# Altium PCB TM1638.PcbDoc (part 1 of 2)
Units mil, origin at the board's own origin, x right, y up, seen from the top; angles counter-clockwise.
Board outline 4735 x 2655 mil, 2 copper layers (Top Layer, Bottom Layer); 45 components, 32 nets, 151 pads, 57 vias.
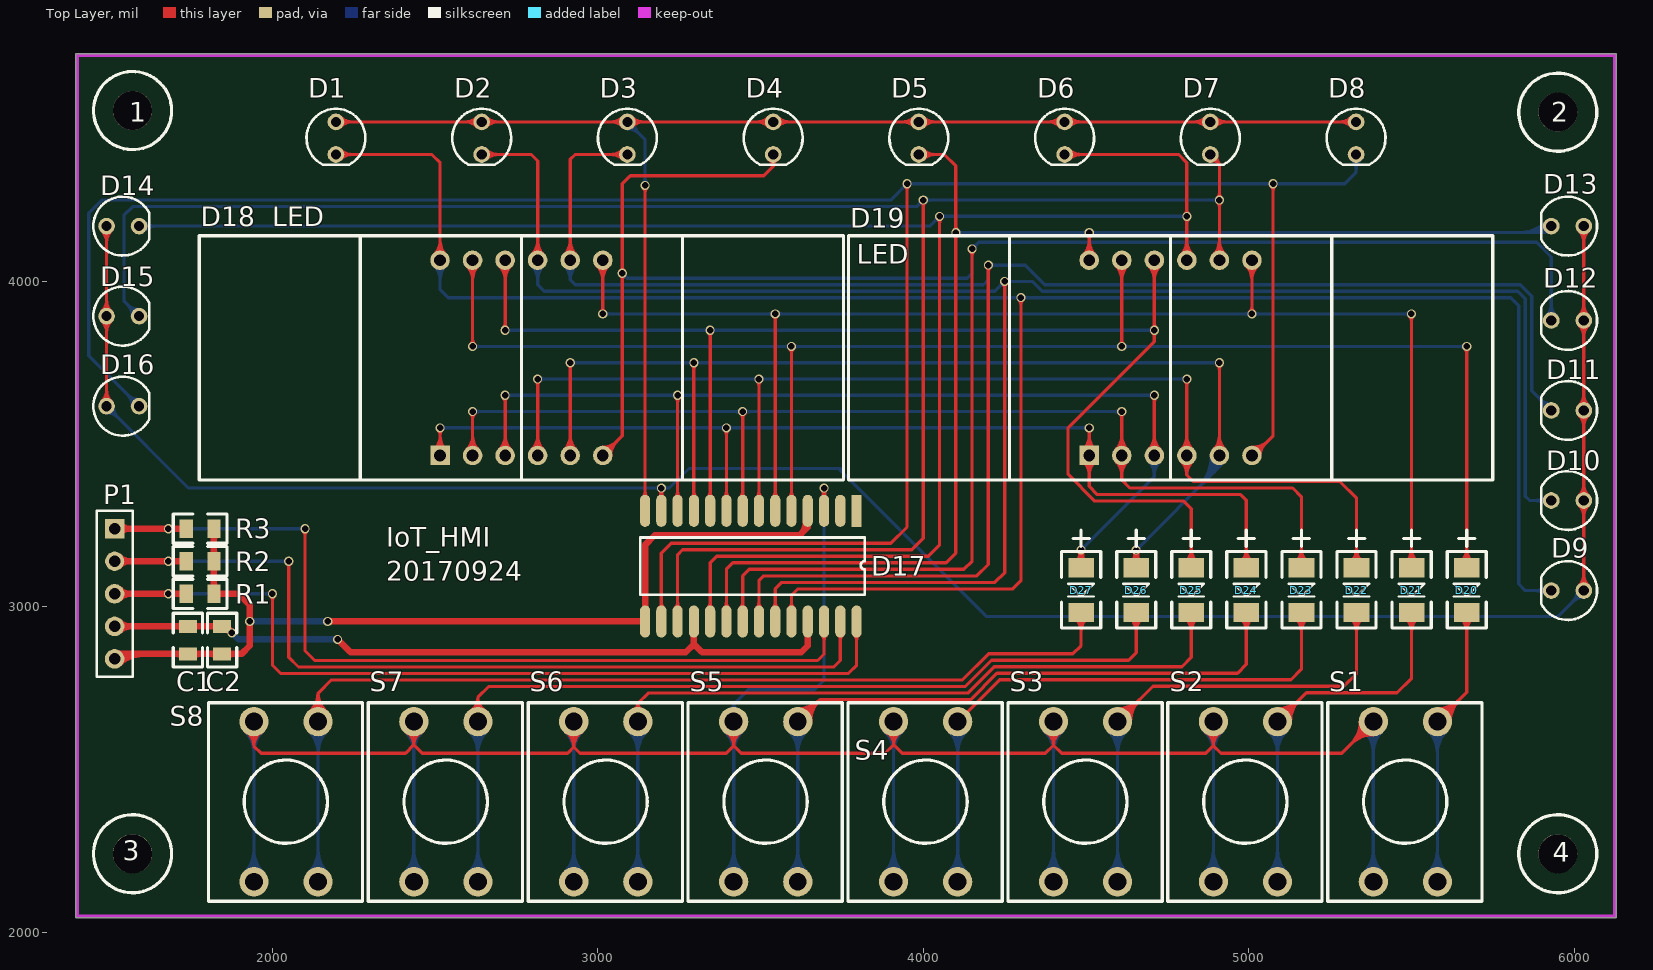
[diagram p0: Top Layer view]
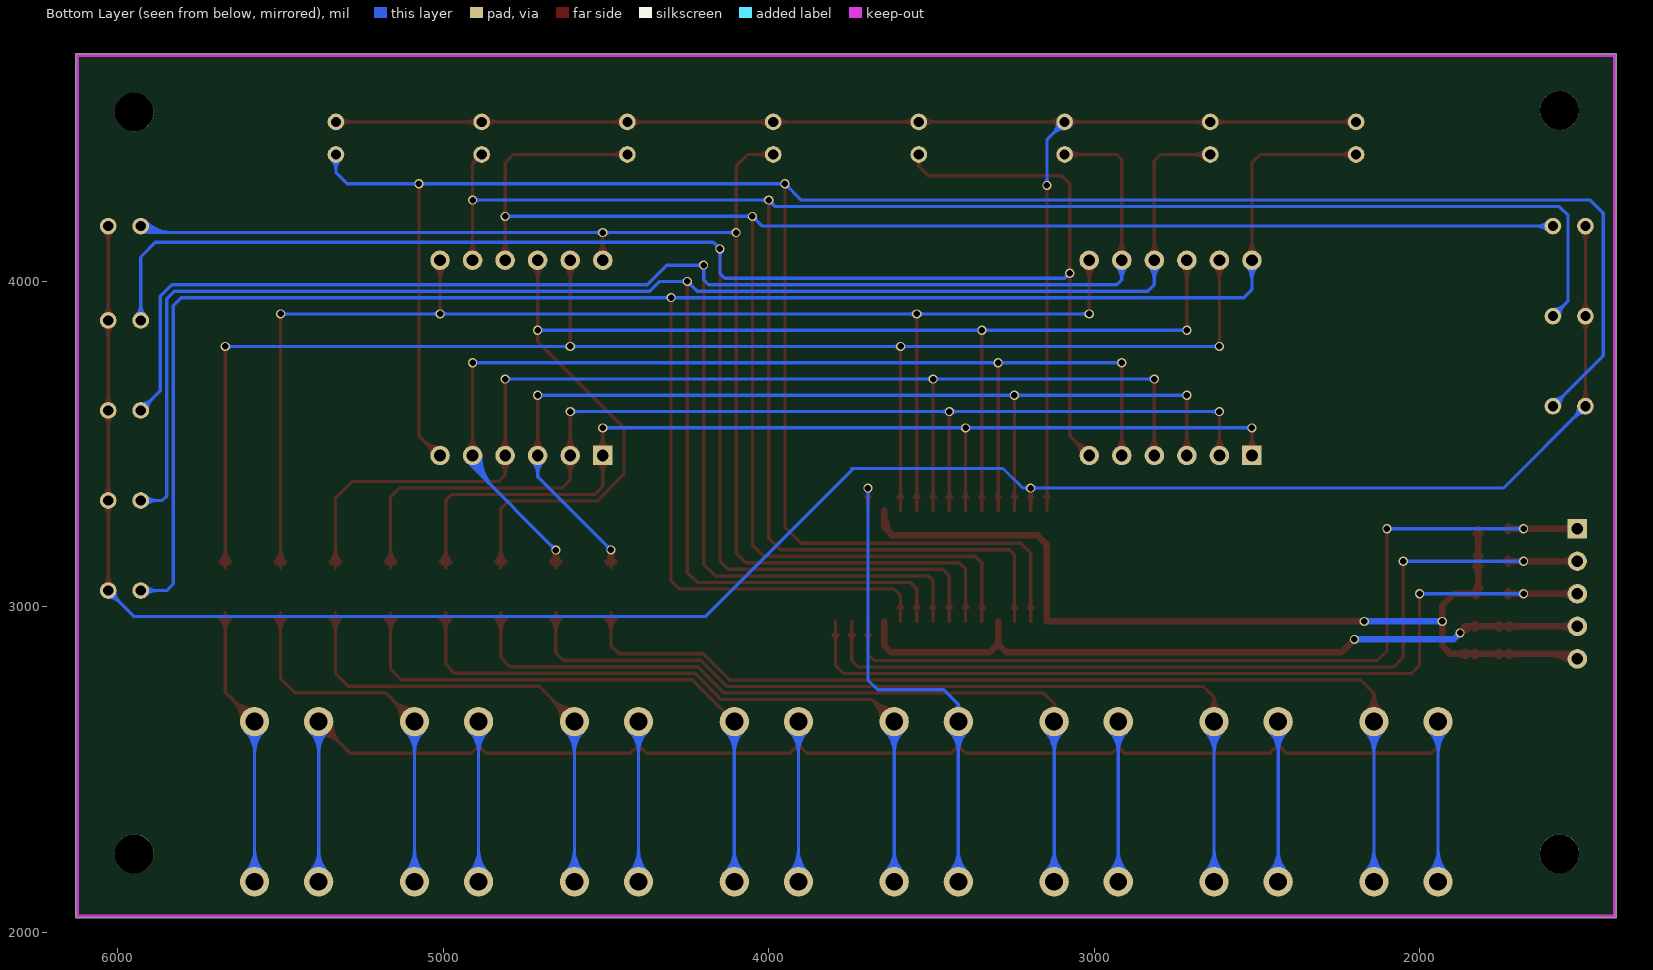
[diagram p1: Bottom Layer view, seen from below]

## Layer stack, top to bottom
Top Layer: signal copper 1.4
Dielectric: dielectric 12.6, FR-4, Dk 4.8
Bottom Layer: signal copper 1.4

## Board outline
1395,4700 6130,4700 6130,2045 1395,2045

## Design rules (kind name [scope] priority, off if disabled: settings)
Clearance [All] p1: gap=10
ComponentClearance [All] p1 off: gap=10 collisioncheckmode=3 verticalgap=10 showdistances=TRUE
Height [All] p1 off: minheight=0 maxheight=1000 prefheight=500
PolygonConnect [All] p1: connectstyle=Relief reliefconductorwidth=10 reliefentries=4 polygonreliefangle="90 Angle"
RoutingVias [All] p1: holewidth=20 width=28 viastyle="Through Hole" minholewidth=20 minwidth=28 maxholewidth=20 maxwidth=28
SilkscreenOverComponentPads [All] p1: minsilkscreentomaskgap=10
SolderMaskExpansion [All] p1: expansion=4
Width [All] p1: maxlimit=20 minlimit=10 preferedwidth=10
25 further rules are at their usual default settings.

## Classes and differential pairs
component class TM1638: 1 2 3 4 D1 D2 D3 D4 D5 D6 D7 D8 D9 D10 D11 D12 D13 D14 D15 D16 D19 D20 D21 D22 D23 D24 D25 D26 D27 P1 S1 S2 S3 S4 S5 S6 S7 S8

## Components (designator, comment, footprint, x,y, rotation, side; value= is the part's Value field where it differs from the comment)
1 "SIP1" hole 1570,4525 r90 top
2 "SIP1" hole 5950,4520 r90 top
3 "SIP1" hole 1570,2241 r90 top
4 "SIP1" hole 5950,2241 r90 top
C1 "Cap Pol3" 0805 1785,2815 r90 top
C2 "104" 0805 1800,2980 r270 top
D1 "LED3" LED0 2195,4440 r270 top
D2 "LED3" LED0 2642.86,4440 r270 top
D3 "LED3" LED0 3090.71,4440 r270 top
D4 "LED3" LED0 3538.57,4440 r270 top
D5 "LED3" LED0 3986.43,4440 r270 top
D6 "LED3" LED0 4434.29,4440 r270 top
D7 "LED3" LED0 4882.14,4440 r270 top
D8 "LED3" LED0 5330,4440 r270 top
D9 "LED3" LED0 5980,3050 r180 top
D10 "LED3" LED0 5980,3326.67 r180 top
D11 "LED3" LED0 5980,3603.33 r180 top
D12 "LED3" LED0 5980,3880 r180 top
D13 "LED3" LED0 5980,4170 r180 top
D14 "LED3" LED0 1540,4170 r0 top
D15 "LED3" LED0 1540,3893.33 r0 top
D16 "LED3" LED0 1540,3616.67 r0 top
D17 "TM1638" SOP28 3795,3295 r270 top locked
D18 "LED4" LED4 1775,3390 r0 top locked
D19 "LED4" LED4 3770,3390 r0 top locked
D20 "Diode 1N4006" 1N4148 5610,3170 r270 top
D21 "Diode 1N4006" 1N4148 5440.71,3170 r270 top
D22 "Diode 1N4006" 1N4148 5271.43,3170 r270 top
D23 "Diode 1N4006" 1N4148 5102.14,3170 r270 top
D24 "Diode 1N4006" 1N4148 4932.86,3170 r270 top
D25 "Diode 1N4006" 1N4148 4763.57,3170 r270 top
D26 "Diode 1N4006" 1N4148 4594.29,3170 r270 top
D27 "Diode 1N4006" 1N4148 4425,3170 r270 top
P1 "MHDR1X5" CON5 1515,3240 r270 top
R1 "Res2" 0805 1695,2995 r0 top
R2 "Res2" 0805 1695,3095 r0 top
R3 "Res2" 0805 1695,3195 r0 top
S1 "SW-PB" key 5480,2400 r90 top locked
S2 "SW-PB" key 4988.57,2400 r90 top locked
S3 "SW-PB" key 4497.14,2400 r90 top locked
S4 "SW-PB" key 4005.71,2400 r90 top locked
S5 "SW-PB" key 3514.29,2400 r90 top locked
S6 "SW-PB" key 3022.86,2400 r90 top locked
S7 "SW-PB" key 2531.43,2400 r90 top locked
S8 "SW-PB" key 2040,2400 r90 top locked

## Footprints (in the part's own frame and the unit in brackets; to place one, negate y for a bottom-side part, rotate by r counter-clockwise, add the part's x,y. Pads: shape width x height; smd on the part's side, far side on the other; paste and mask are expansions set on the pad)
1N4148 [mm]
  rect 1.5x2 smd: 1(1.27,1.524) 2(4.77,1.524)
  silkscreen extent -1.65,0 5.97,3.05
0805 [mil]
  rect 40x56 smd: 1(40,45) 2(125,45)
  silkscreen extent 0,0 165,90
CON5 [mil]
  rect 59.06x59.06 hole 35.43: 1(0,0)
  round 59.06 hole 35.43: 2(100,0)
  round 60 hole 36: 3(200,0) 4(300,0) 5(400,0)
  silkscreen extent -55,-55 455,55
hole [mil]
  round 120 hole 120: ""(0,0)
  silkscreen extent -120,-120 120,120
key [mil]
  round 90 hole 55: 1(-245,97) 1(247,97) 2(-245,-100) 2(247,-100)
  silkscreen extent -305,-237 305,237
LED0 [mm]
  round 1.3 hole 0.8: 1(-1.27,0) 2(1.27,0)
  silkscreen extent -2.3,-2.3 2.06,2.3
LED4 [mil]
  rect 60x60 hole 36: 1(740,75)
  round 60 hole 36: 2(840,75) 3(940,75) 4(1040,75) 5(1140,75) 6(1240,75) 7(1240,675) 8(1140,675) 9(1040,675) 10(940,675) 11(840,675) 12(740,675)
  silkscreen extent 0,0 1980,750
SOP28 [mm]
  rect 2.5x0.8 smd: 1(0,0)
  oval 2.5x0.8 smd: 2(0,-1.27) 3(0,-2.54) 4(0,-3.81) 5(0,-5.08) 6(0,-6.35) 7(0,-7.62) 8(0,-8.89) 9(0,-10.16) 10(0,-11.43) 11(0,-12.7) 12(0,-13.97) 13(0,-15.24) 14(0,-16.51) 15(8.636,-16.51) 16(8.636,-15.24) 17(8.636,-13.97) 18(8.636,-12.7) 19(8.636,-11.43) 20(8.636,-10.16) 21(8.636,-8.89) 22(8.636,-7.62) 23(8.636,-6.35) 24(8.636,-5.08) 25(8.636,-3.81) 26(8.636,-2.54) 27(8.636,-1.27) 28(8.636,0)
  silkscreen extent 2.09,-16.89 6.56,0.64

## Part data
1 2 3 4: "Variable Resistor"
C1: "Polarized Capacitor (Surface Mount)"
C2: library part "Cap Semi", "Capacitor (Semiconductor SIM Model)"
D1 D2 D3 D4 D5 D6 D7 D8 D9 D10 D11 D12 D13 D14 D15 D16: "Typical BLUE SiC LED"
D18 D19: library part LED_N4
D20 D21 D22 D23 D24 D25 D26 D27: "1 Amp General Purpose Rectifier"
P1: "Header, 5-Pin"
R1 R2 R3: "Resistor"
S1 S2 S3 S4 S5 S6 S7 S8: "Switch"

## Via types
v1: diameter 28, hole 20, Top Layer to Bottom Layer, 57 vias

## Nets (pads, with @x,y where several pads share a name; then routed paths per layer and width w, separated by ;. In a path a pad name is that pad's centre, name@x,y a point inside that pad or via, vN(x,y) a via of type N, cw(c..) or ccw(c..) an arc to the next point about the centre after c; other vN are vias at no path point)
CLK: D17.27 P1.2 R2.1 | length 3044.1
  Top Layer w10: v1(2050,3140) 2050,2845 2080,2815 2855,2815 3725,2815 3745,2835 D17.27@3745,2955 ; D17.27@3737.4,2913.94 cw(c3719.05,2895.59) 3745,2895.59 cw(c3770.95,2895.59) D17.27@3752.6,2913.94 ; 2050,3118.27 ccw(c2028.27,3118.27) 2043.64,3133.64 cw(c2028.27,3118.27) 2050,3118.27 ; 2050,3118.27 cw(c2071.73,3118.27) 2056.36,3133.64 ccw(c2071.73,3118.27) 2050,3118.27
  Top Layer w20: P1.2@1515,3140 v1(1680,3140) R2.1@1735,3140 ; P1.2@1528.81,3126.19 cw(c1562.14,3092.86) 1562.14,3140 cw(c1562.14,3187.14) P1.2@1528.81,3153.81 ; R2.1@1727.93,3132.93 ccw(c1710.86,3115.86) 1710.86,3140 ccw(c1710.86,3164.14) R2.1@1727.93,3147.07
  Bottom Layer w10: v1(1680,3140) v1(2050,3140) ; v1@1686.36,3133.64 cw(c1701.73,3118.27) 1701.73,3140 cw(c1701.73,3161.73) v1@1686.36,3146.36 ; 2028.27,3140 ccw(c2028.27,3161.73) 2043.64,3146.36 cw(c2028.27,3161.73) 2028.27,3140 ; 2028.27,3140 cw(c2028.27,3118.27) 2043.64,3133.64 ccw(c2028.27,3118.27) 2028.27,3140
  other v1: 2050,3140
DIO: D17.26 P1.1 R3.1 | length 3054.1
  Top Layer w10: v1(2100,3240) 2100,2865 2130,2835 3675,2835 3695,2855 D17.26@3695,2955 ; D17.26@3687.4,2913.94 cw(c3669.05,2895.59) 3695,2895.59 cw(c3720.95,2895.59) D17.26@3702.6,2913.94 ; 2100,3218.27 ccw(c2078.27,3218.27) 2093.64,3233.64 cw(c2078.27,3218.27) 2100,3218.27 ; 2100,3218.27 cw(c2121.73,3218.27) 2106.36,3233.64 ccw(c2121.73,3218.27) 2100,3218.27
  Top Layer w20: P1.1@1515,3240 v1(1680,3240) R3.1@1735,3240 ; P1.1@1528.81,3226.19 cw(c1562.14,3192.86) 1562.14,3240 cw(c1562.14,3287.14) P1.1@1528.81,3253.81 ; R3.1@1727.93,3232.93 ccw(c1710.86,3215.86) 1710.86,3240 ccw(c1710.86,3264.14) R3.1@1727.93,3247.07
  Bottom Layer w10: v1(1680,3240) v1(2100,3240) ; v1@1686.36,3233.64 cw(c1701.73,3218.27) 1701.73,3240 cw(c1701.73,3261.73) v1@1686.36,3246.36 ; 2078.27,3240 ccw(c2078.27,3261.73) 2093.64,3246.36 cw(c2078.27,3261.73) 2078.27,3240 ; 2078.27,3240 cw(c2078.27,3218.27) 2093.64,3233.64 ccw(c2078.27,3218.27) 2078.27,3240
  other v1: 2100,3240
GND: C1.2 C2.1 D17.18 D17.25 P1.4 | length 2578.5
  Top Layer w20: P1.4@1515,2940 C1.2@1740,2940 C2.1@1845,2940 1855,2940 v1(1875,2920) ; P1.4@1529.14,2925.86 cw(c1563.28,2891.72) 1563.28,2940 cw(c1563.28,2988.28) P1.4@1529.14,2954.14 ; C1.2@1724.93,2932.93 ccw(c1707.86,2915.86) 1707.86,2940 ccw(c1707.86,2964.14) C1.2@1724.93,2947.07 ; C1.2@1755.07,2932.93 cw(c1772.14,2915.86) 1772.14,2940 cw(c1772.14,2964.14) C1.2@1755.07,2947.07 ; C2.1@1829.93,2932.93 ccw(c1812.86,2915.86) 1812.86,2940 ccw(c1812.86,2964.14) C2.1@1829.93,2947.07 ; C2.1@1853,2930 cw(c1853,2901.03) v1@1873.49,2921.51 ; C2.1@1863,2940 ccw(c1882.31,2940) C2.1@1868.66,2926.34 ; C2.1@1865.36,2932.06 ccw(c1880.59,2940.85) v1@1876.04,2923.86 ; v1(2200,2900) 2240,2860 3270,2860 3295,2885 ; D17.18@3295,2955 3295,2885 ; D17.25@3645,2955 3645,2880 3625,2860 3320,2860 3295,2885
  Bottom Layer w20: v1(1875,2920) 1895,2900 v1(2200,2900)
GR1: D1.2 D9.2 D17.24 D18.12 | length 7295.7
  Top Layer w10: D1.2@2195,4390 2490,4390 2515,4365 D18.12@2515,4065 ; D1.2@2209.56,4375.44 cw(c2244.71,4340.29) 2244.71,4390 cw(c2244.71,4439.71) D1.2@2209.56,4404.56 ; D18.12@2497.32,4082.68 ccw(c2454.64,4125.36) 2515,4125.36 ccw(c2575.36,4125.36) D18.12@2532.68,4082.68 ; D18.12@2504.39,4075.61 ccw(c2478.79,4101.21) 2515,4101.21 ccw(c2551.21,4101.21) D18.12@2525.61,4075.61 ; D17.24@3587.4,2996.06 ccw(c3569.05,3014.41) 3595,3014.41 ccw(c3620.95,3014.41) D17.24@3602.6,2996.06 ; D17.24@3595,2955 3595,3035 3615,3055 4275,3055 4300,3080 v1(4300,3950) ; v1@4293.64,3943.64 cw(c4278.27,3928.27) 4300,3928.27 cw(c4321.73,3928.27) v1@4306.36,3943.64
  Bottom Layer w10: D18.12@2497.32,4047.32 cw(c2454.64,4004.64) 2515,4004.64 cw(c2575.36,4004.64) D18.12@2532.68,4047.32 ; D18.12@2504.39,4054.39 cw(c2478.79,4028.79) 2515,4028.79 cw(c2551.21,4028.79) D18.12@2525.61,4054.39 ; D18.12@2515,4065 2515,3975 2540,3950 v1(4300,3950) 5805,3950 5830,3925 5830,3070 5850,3050 D9.2@5930,3050 ; v1@4293.64,3943.64 ccw(c4278.27,3928.27) 4278.27,3950 ccw(c4278.27,3971.73) v1@4293.64,3956.36 ; v1@4306.36,3943.64 cw(c4321.73,3928.27) 4321.73,3950 cw(c4321.73,3971.73) v1@4306.36,3956.36 ; D9.2@5915.44,3035.44 ccw(c5880.29,3000.29) 5880.29,3050 ccw(c5880.29,3099.71) D9.2@5915.44,3064.56
GR2: D2.2 D10.2 D17.23 D18.9 | length 6653.9
  Top Layer w10: D2.2@2642.86,4390 2795,4390 2815,4370 D18.9@2815,4065 ; D2.2@2657.42,4375.44 cw(c2692.57,4340.29) 2692.57,4390 cw(c2692.57,4439.71) D2.2@2657.42,4404.56 ; D18.9@2797.32,4082.68 ccw(c2754.64,4125.36) 2815,4125.36 ccw(c2875.36,4125.36) D18.9@2832.68,4082.68 ; D18.9@2804.39,4075.61 ccw(c2778.79,4101.21) 2815,4101.21 ccw(c2851.21,4101.21) D18.9@2825.61,4075.61 ; D17.23@3537.4,2996.06 ccw(c3519.05,3014.41) 3545,3014.41 ccw(c3570.95,3014.41) D17.23@3552.6,2996.06 ; D17.23@3545,2955 3545,3055 3565,3075 4220,3075 4250,3105 v1(4250,4000) ; v1@4243.64,3993.64 cw(c4228.27,3978.27) 4250,3978.27 cw(c4271.73,3978.27) v1@4256.36,3993.64
  Bottom Layer w10: D18.9@2797.32,4047.32 cw(c2754.64,4004.64) 2815,4004.64 cw(c2875.36,4004.64) D18.9@2832.68,4047.32 ; D18.9@2804.39,4054.39 cw(c2778.79,4028.79) 2815,4028.79 cw(c2851.21,4028.79) D18.9@2825.61,4054.39 ; D18.9@2815,4065 2815,3990 2835,3970 4220,3970 v1(4250,4000) 4335,4000 4365,3970 5826.72,3970 5850,3946.72 5850,3340 5863.33,3326.67 D10.2@5930,3326.67 ; v1@4241,4000 cw(c4219.27,4000) 4234.64,3984.64 cw(c4250,3969.27) v1@4250,3991 ; v1@4256.36,3993.64 cw(c4271.73,3978.27) 4271.73,4000 cw(c4271.73,4021.73) v1@4256.36,4006.36 ; D10.2@5915.44,3312.11 ccw(c5880.29,3276.96) 5880.29,3326.67 ccw(c5880.29,3376.38) D10.2@5915.44,3341.23
GR3: D3.2 D11.2 D17.22 D18.8 | length 6352.3
  Top Layer w10: D18.8@2897.32,4082.68 ccw(c2854.64,4125.36) 2915,4125.36 ccw(c2975.36,4125.36) D18.8@2932.68,4082.68 ; D18.8@2904.39,4075.61 ccw(c2878.79,4101.21) 2915,4101.21 ccw(c2951.21,4101.21) D18.8@2925.61,4075.61 ; D18.8@2915,4065 2915,4375 2930,4390 D3.2@3090.71,4390 ; D3.2@3076.15,4375.44 ccw(c3041,4340.29) 3041,4390 ccw(c3041,4439.71) D3.2@3076.15,4404.56 ; D17.22@3487.4,2996.06 ccw(c3469.05,3014.41) 3495,3014.41 ccw(c3520.95,3014.41) D17.22@3502.6,2996.06 ; D17.22@3495,2955 3495,3080 3510,3095 4165,3095 4200,3130 v1(4200,4050) ; v1@4193.64,4043.64 cw(c4178.27,4028.27) 4200,4028.27 cw(c4221.73,4028.27) v1@4206.36,4043.64
  Bottom Layer w10: D18.8@2897.4,4047.25 cw(c2855.51,4005) 2915,4005 ; D18.8@2904.44,4054.35 cw(c2879.3,4029) 2915,4029 cw(c2950.7,4029) D18.8@2925.56,4054.35 ; D18.8@2915,4065 2915,4005 ; D18.8@2932.6,4047.25 ccw(c2974.49,4005) 2915,4005 ; v1@4193.64,4043.64 cw(c4178.27,4028.27) 4200,4028.27 cw(c4221.73,4028.27) 4206.36,4043.64 cw(c4221.73,4028.27) 4221.73,4050 cw(c4221.73,4071.73) v1@4206.36,4056.36 ; D11.2@5909.41,3603.33 ccw(c5859.7,3603.33) 5894.85,3638.48 ccw(c5930,3673.63) D11.2@5930,3623.92 ; D11.2@5930,3603.33 5870,3663.33 5870,3955 5835,3990 4373.28,3990 4313.28,4050 v1(4200,4050) 4200,4005 4185,3990 2930,3990 2915,4005
GR4: D4.2 D12.2 D17.21 D18.6 | length 6889.2
  Top Layer w10: D18.6@3015,3465 3075,3525 v1(3075,4025) 3075,4300 3100,4325 3510,4325 3538.57,4353.57 ; D18.6@3015,3480 ccw(c3015,3516.21) 3040.61,3490.61 ccw(c3066.21,3465) D18.6@3030,3465 ; D18.6@3015,3490 ccw(c3015,3550.36) 3057.68,3507.68 ccw(c3100.36,3465) D18.6@3040,3465 ; v1@3068.64,4018.64 cw(c3053.27,4003.27) 3075,4003.27 cw(c3096.73,4003.27) v1@3081.36,4018.64 ; v1@3068.64,4031.36 ccw(c3053.27,4046.73) 3075,4046.73 ccw(c3096.73,4046.73) v1@3081.36,4031.36 ; D17.21@3437.4,2996.06 ccw(c3419.05,3014.41) 3445,3014.41 ccw(c3470.95,3014.41) D17.21@3452.6,2996.06 ; D17.21@3445,2955 3445,3095 3465,3115 4125,3115 4150,3140 v1(4150,4100) ; D4.2@3527.95,4372.36 cw(c3516.65,4353.57) 3538.57,4353.57 ; D4.2@3538.57,4390 3538.57,4353.57 ; D4.2@3549.19,4372.36 ccw(c3560.5,4353.57) 3538.57,4353.57 ; v1@4143.64,4093.64 cw(c4128.27,4078.27) 4150,4078.27 cw(c4171.73,4078.27) v1@4156.36,4093.64
  Bottom Layer w10: v1(3075,4025) 3090,4010 ; v1@3075.15,4016 cw(c3075.51,3995.51) 3090,4010 ; v1@3084,4024.85 ccw(c3104.49,4024.49) 3090,4010 ; v1@4143.64,4093.64 cw(c4128.27,4078.27) 4150,4078.27 cw(c4171.73,4078.27) v1@4156.36,4093.64 ; v1@4150,4109 ccw(c4150,4130.73) 4165.36,4115.36 ccw(c4180.73,4100) v1@4159,4100 ; D12.2@5915.44,3894.56 ccw(c5880.29,3929.71) 5930,3929.71 ccw(c5979.71,3929.71) D12.2@5944.56,3894.56 ; D12.2@5930,3880 5930,4075 5885,4120 4170,4120 v1(4150,4100) 4150,4025 4135,4010 3090,4010
GR5: D5.2 D13.2 D17.20 D19.12 | length 4859.3
  Top Layer w10: D17.20@3387.4,2996.06 ccw(c3369.05,3014.41) 3395,3014.41 ccw(c3420.95,3014.41) D17.20@3402.6,2996.06 ; D17.20@3395,2955 3395,3115 3415,3135 4070,3135 4100,3165 v1(4100,4150) 4100,4355 4065,4390 D5.2@3986.43,4390 ; D5.2@4000.99,4375.44 cw(c4036.14,4340.29) 4036.14,4390 cw(c4036.14,4439.71) D5.2@4000.99,4404.56 ; v1@4093.64,4143.64 cw(c4078.27,4128.27) 4100,4128.27 cw(c4121.73,4128.27) v1@4106.36,4143.64 ; v1@4093.64,4156.36 ccw(c4078.27,4171.73) 4100,4171.73 ccw(c4121.73,4171.73) v1@4106.36,4156.36 ; D19.12@4492.32,4082.68 ccw(c4449.64,4125.36) 4510,4125.36 ccw(c4570.36,4125.36) D19.12@4527.68,4082.68 ; D19.12@4499.39,4075.61 ccw(c4473.79,4101.21) 4510,4101.21 ccw(c4546.21,4101.21) D19.12@4520.61,4075.61 ; v1@4503.64,4143.64 cw(c4488.27,4128.27) 4510,4128.27 cw(c4531.73,4128.27) v1@4516.36,4143.64 ; D19.12@4510,4065 v1(4510,4150)
  Bottom Layer w10: v1(4100,4150) v1(4510,4150) 5910,4150 D13.2@5930,4170 ; v1@4106.36,4143.64 cw(c4121.73,4128.27) 4121.73,4150 cw(c4121.73,4171.73) v1@4106.36,4156.36 ; v1@4503.64,4143.64 ccw(c4488.27,4128.27) 4488.27,4150 ccw(c4488.27,4171.73) v1@4503.64,4156.36 ; v1@4516.36,4143.64 cw(c4531.73,4128.27) 4531.73,4150 cw(c4531.73,4171.73) v1@4516.36,4156.36 ; 5832.01,4150 ccw(c5832.01,4267.99) D13.2@5915.44,4184.56 ; 5856.15,4150 ccw(c5856.15,4243.85) D13.2@5922.51,4177.49 ; 5880.29,4150 ccw(c5880.29,4219.71) D13.2@5929.58,4170.42 ; 5904.43,4150 ccw(c5904.43,4195.57) D13.2@5936.65,4163.35
GR6: D6.2 D14.2 D17.19 D19.9 | length 6389.7
  Top Layer w10: D17.19@3337.4,2996.06 ccw(c3319.05,3014.41) 3345,3014.41 ccw(c3370.95,3014.41) D17.19@3352.6,2996.06 ; D17.19@3345,2955 3345,3135 3365,3155 4015,3155 4050,3190 v1(4050,4200) ; v1@4043.64,4193.64 cw(c4028.27,4178.27) 4050,4178.27 cw(c4071.73,4178.27) v1@4056.36,4193.64 ; D6.2@4434.29,4390 4785,4390 4810,4365 v1(4810,4200) D19.9@4810,4065 ; D6.2@4448.85,4375.44 cw(c4484,4340.29) 4484,4390 cw(c4483.99,4439.71) D6.2@4448.85,4404.56 ; D19.9@4792.32,4082.68 ccw(c4749.64,4125.36) 4810,4125.36 ccw(c4870.36,4125.36) D19.9@4827.68,4082.68 ; D19.9@4799.39,4075.61 ccw(c4773.79,4101.21) 4810,4101.21 ccw(c4846.21,4101.21) D19.9@4820.61,4075.61 ; v1@4803.64,4193.64 cw(c4788.27,4178.27) 4810,4178.27 cw(c4831.73,4178.27) v1@4816.36,4193.64 ; v1@4803.64,4206.36 ccw(c4788.27,4221.73) 4810,4221.73 ccw(c4831.73,4221.73) v1@4816.36,4206.36
  Bottom Layer w10: D14.2@1590,4170 4020,4170 v1(4050,4200) v1(4810,4200) ; D14.2@1604.56,4155.44 cw(c1639.71,4120.29) 1639.71,4170 cw(c1639.71,4219.71) D14.2@1604.56,4184.56 ; v1@4041,4200 cw(c4019.27,4200) 4034.64,4184.64 cw(c4050,4169.27) v1@4050,4191 ; v1@4056.36,4193.64 cw(c4071.73,4178.27) 4071.73,4200 cw(c4071.73,4221.73) v1@4056.36,4206.36 ; v1@4803.64,4193.64 ccw(c4788.27,4178.27) 4788.27,4200 ccw(c4788.27,4221.73) v1@4803.64,4206.36
GR7: D7.2 D15.2 D17.17 D19.8 | length 6600.7
  Top Layer w10: D17.17@3237.4,2996.06 ccw(c3219.05,3014.41) 3245,3014.41 ccw(c3270.95,3014.41) D17.17@3252.6,2996.06 ; D17.17@3245,2955 3245,3160 3260,3175 3965,3175 4000,3210 v1(4000,4250) ; v1@3993.64,4243.64 cw(c3978.27,4228.27) 4000,4228.27 cw(c4021.73,4228.27) v1@4006.36,4243.64 ; D7.2@4882.14,4390 4910,4362.14 ; D7.2@4885.79,4369.73 cw(c4890.63,4342.78) 4910,4362.14 ; D19.8@4892.32,4082.68 ccw(c4849.64,4125.36) 4910,4125.36 ccw(c4970.36,4125.36) D19.8@4927.68,4082.68 ; D19.8@4899.39,4075.61 ccw(c4873.79,4101.21) 4910,4101.21 ccw(c4946.21,4101.21) D19.8@4920.61,4075.61 ; D7.2@4902.41,4386.36 ccw(c4929.37,4381.51) 4910,4362.14 ; v1@4903.64,4243.64 cw(c4888.27,4228.27) 4910,4228.27 cw(c4931.73,4228.27) v1@4916.36,4243.64 ; v1@4903.64,4256.36 ccw(c4888.27,4271.73) 4910,4271.73 ccw(c4931.73,4271.73) v1@4916.36,4256.36 ; D19.8@4910,4065 v1(4910,4250) 4910,4362.14
  Bottom Layer w10: D15.2@1569.41,3893.33 ccw(c1519.7,3893.33) 1554.85,3928.48 ccw(c1590,3963.63) D15.2@1590,3913.92 ; D15.2@1590,3893.33 1543.33,3940 1543.33,4203.33 1570,4230 3980,4230 v1(4000,4250) v1(4910,4250) ; v1@3991,4250 cw(c3969.27,4250) 3984.64,4234.64 cw(c4000,4219.27) v1@4000,4241 ; v1@4006.36,4243.64 cw(c4021.73,4228.27) 4021.73,4250 cw(c4021.73,4271.73) v1@4006.36,4256.36 ; v1@4903.64,4243.64 ccw(c4888.27,4228.27) 4888.27,4250 ccw(c4888.27,4271.73) v1@4903.64,4256.36
GR8: D8.2 D16.2 D17.16 D19.6 | length 8111.7
  Top Layer w10: D17.16@3187.4,2996.06 ccw(c3169.05,3014.41) 3195,3014.41 ccw(c3220.95,3014.41) D17.16@3202.6,2996.06 ; D17.16@3195,2955 3195,3165 3225,3195 3900,3195 3950,3245 v1(3950,4300) ; v1@3943.64,4293.64 cw(c3928.27,4278.27) 3950,4278.27 cw(c3971.73,4278.27) v1@3956.36,4293.64 ; D19.6@5010,3465 5015,3465 5075,3525 v1(5075,4300) ; D19.6@5010,3480 ccw(c5010,3528.28) 5044.14,3494.14 ; D19.6@5010,3490 ccw(c5010,3562.43) 5061.21,3511.21 ; D19.6@5035,3465 cw(c5083.28,3465) 5049.14,3499.14 ; v1@5068.64,4293.64 cw(c5053.27,4278.27) 5075,4278.27 cw(c5096.73,4278.27) v1@5081.36,4293.64
  Bottom Layer w10: D16.2@1569.41,3616.67 ccw(c1519.7,3616.67) 1554.85,3651.82 ccw(c1590,3686.97) D16.2@1590,3637.26 ; D16.2@1590,3616.67 1435,3771.67 1435,4210 1475,4250 3900,4250 v1(3950,4300) v1(5075,4300) 5295,4300 5330,4335 D8.2@5330,4390 ; v1@3941,4300 cw(c3919.27,4300) 3934.64,4284.64 cw(c3950,4269.27) v1@3950,4291 ; v1@3956.36,4293.64 cw(c3971.73,4278.27) 3971.73,4300 cw(c3971.73,4321.73) v1@3956.36,4306.36 ; v1@5068.64,4293.64 ccw(c5053.27,4278.27) 5053.27,4300 ccw(c5053.27,4321.73) v1@5068.64,4306.36 ; v1@5081.36,4293.64 cw(c5096.73,4278.27) 5096.73,4300 cw(c5096.73,4321.73) v1@5081.36,4306.36 ; D8.2@5315.44,4375.44 cw(c5280.29,4340.29) 5330,4340.29 cw(c5379.71,4340.29) D8.2@5344.56,4375.44
K3: D17.3 S1.1 S2.1 S3.1 S4.1 S5.1 S6.1 S7.1 S8.1 | length 16238.8
  Top Layer w10: S8.1@1920.72,2613.78 cw(c1892.69,2572) 1943,2572 ; S8.1@1926.29,2622.09 cw(c1905.27,2590.75) 1943,2590.75 cw(c1980.73,2590.75) S8.1@1959.71,2622.09 ; S8.1@1943,2647 1943,2572 ; S8.1@1965.28,2613.78 ccw(c1993.31,2572) 1943,2572 ; S7.1@2413.53,2612.89 cw(c2390.66,2575.57) 2434.43,2575.57 ; S7.1@2418.75,2621.42 cw(c2401.6,2593.43) 2434.43,2593.43 cw(c2467.26,2593.43) S7.1@2450.1,2621.42 ; S7.1@2434.43,2647 2434.43,2575.57 ; S7.1@2455.33,2612.89 ccw(c2478.2,2575.57) 2434.43,2575.57 ; S6.1@2902.57,2614.48 cw(c2870.09,2569.14) 2925.86,2569.14 ; S6.1@2908.39,2622.61 cw(c2884.03,2588.61) 2925.86,2588.61 cw(c2967.68,2588.61) S6.1@2943.33,2622.61 ; S6.1@2925.86,2647 2925.86,2569.14 ; S6.1@2949.15,2614.48 ccw(c2981.63,2569.14) 2925.86,2569.14 ; S5.1@3395.27,2613.6 cw(c3368.31,2572.72) 3417.29,2572.72 ; S5.1@3400.77,2621.95 cw(c3380.55,2591.29) 3417.29,2591.29 cw(c3454.02,2591.29) S5.1@3433.8,2621.95 ; S5.1@3417.29,2647 3417.29,2572.71 ; S5.1@3439.3,2613.6 ccw(c3466.26,2572.72) 3417.29,2572.72 ; D17.3@3687.4,3336.06 ccw(c3669.05,3354.41) 3695,3354.41 ccw(c3720.95,3354.41) D17.3@3702.6,3336.06 ; v1@3688.64,3358.64 cw(c3673.27,3343.27) 3695,3343.27 cw(c3716.73,3343.27) v1@3701.36,3358.64 ; v1@3689.06,3358.24 cw(c3681.06,3349.16) 3692.75,3346.02 ; v1@3690.5,3357.21 cw(c3684.31,3346.49) 3696.26,3349.69 ; 3693.74,3349.69 cw(c3705.69,3346.49) v1@3699.5,3357.21 ; D17.3@3695,3295 v1(3695,3365) ; 3697.25,3346.02 cw(c3708.94,3349.16) v1@3700.94,3358.24 ; S4.1@3888.11,2612.72 cw(c3866.21,2576.29) 3908.71,2576.29 ; S4.1@3893.26,2621.29 cw(c3876.84,2593.97) 3908.71,2593.97 cw(c3940.59,2593.97) S4.1@3924.17,2621.29 ; S4.1@3908.71,2647 3908.71,2576.29 ; S4.1@3929.32,2612.72 ccw(c3951.22,2576.29) 3908.71,2576.29 ; S3.1@4378.95,2613.07 cw(c4355.09,2574.86) 4400.14,2574.86 ; S3.1@4384.25,2621.55 cw(c4366.35,2592.9) 4400.14,2592.9 cw(c4433.93,2592.9) S3.1@4416.03,2621.55 ; S3.1@4400.14,2647 4400.14,2574.86 ; S3.1@4421.33,2613.07 ccw(c4445.19,2574.86) 4400.14,2574.86 ; S2.1@4869.83,2613.43 cw(c4843.92,2573.43) 4891.57,2573.43 ; S2.1@4875.26,2621.82 cw(c4855.83,2591.82) 4891.57,2591.82 cw(c4927.31,2591.82) S2.1@4907.88,2621.82 ; S2.1@4891.57,2647 4891.57,2573.43 ; S2.1@4913.32,2613.43 ccw(c4939.23,2573.43) 4891.57,2573.43 ; S1.1@5343,2647 cw(c5246.43,2647) 5314.72,2578.72 cw(c5383,2510.43) S1.1@5383,2607 ; S1.1@5353,2647 cw(c5280.57,2647) 5331.79,2595.79 cw(c5383,2544.57) S1.1@5383,2617 ; S1.1@5363,2647 cw(c5314.72,2647) 5348.86,2612.86 cw(c5383,2578.72) S1.1@5383,2627 ; S1.1@5383,2647 5286,2550 4915,2550 4891.57,2573.43 ; 1943,2572 1965,2550 2408.86,2550 2434.43,2575.57 ; 2434.43,2575.57 2460,2550 2906.72,2550 2925.86,2569.14 ; 2925.86,2569.14 2945,2550 3394.57,2550 3417.29,2572.71 ; 3417.29,2572.71 3440,2550 3882.43,2550 3908.71,2576.29 ; 3908.71,2576.29 3935,2550 4375.28,2550 4400.14,2574.86 ; 4400.14,2574.86 4425,2550 4868.14,2550 4891.57,2573.43
  Bottom Layer w10: S8.1@1914.72,2183.28 ccw(c1846.43,2251.57) 1943,2251.57 ccw(c2039.57,2251.57) S8.1@1971.28,2183.28 ; S8.1@1914.72,2618.72 cw(c1846.43,2550.43) 1943,2550.43 cw(c2039.57,2550.43) S8.1@1971.28,2618.72 ; S8.1@1921.79,2176.21 ccw(c1870.57,2227.43) 1943,2227.43 ccw(c2015.43,2227.43) S8.1@1964.21,2176.21 ; S8.1@1921.79,2625.79 cw(c1870.57,2574.57) 1943,2574.57 cw(c2015.43,2574.57) S8.1@1964.21,2625.79 ; S8.1@1928.86,2169.14 ccw(c1894.72,2203.28) 1943,2203.28 ccw(c1991.28,2203.28) S8.1@1957.14,2169.14 ; S8.1@1928.86,2632.86 cw(c1894.72,2598.72) 1943,2598.72 cw(c1991.28,2598.72) S8.1@1957.14,2632.86 ; S8.1@1943,2155 S8.1@1943,2647 ; S7.1@2406.14,2183.28 ccw(c2337.86,2251.57) 2434.43,2251.57 ccw(c2531,2251.57) S7.1@2462.71,2183.28 ; S7.1@2406.14,2618.72 cw(c2337.86,2550.43) 2434.43,2550.43 cw(c2531,2550.43) S7.1@2462.71,2618.72 ; S7.1@2413.21,2176.21 ccw(c2362,2227.43) 2434.43,2227.43 ccw(c2506.85,2227.43) S7.1@2455.64,2176.21 ; S7.1@2413.21,2625.79 cw(c2362,2574.57) 2434.43,2574.57 cw(c2506.85,2574.57) S7.1@2455.64,2625.79 ; S7.1@2420.29,2169.14 ccw(c2386.14,2203.28) 2434.43,2203.28 ccw(c2482.71,2203.28) S7.1@2448.57,2169.14 ; S7.1@2420.29,2632.86 cw(c2386.14,2598.72) 2434.43,2598.72 cw(c2482.71,2598.72) S7.1@2448.57,2632.86 ; S7.1@2434.43,2155 S7.1@2434.43,2647 ; S6.1@2897.57,2183.28 ccw(c2829.29,2251.57) 2925.86,2251.57 ccw(c3022.43,2251.57) S6.1@2954.14,2183.28 ; S6.1@2897.57,2618.72 cw(c2829.29,2550.43) 2925.86,2550.43 cw(c3022.43,2550.43) S6.1@2954.14,2618.72 ; S6.1@2904.64,2176.21 ccw(c2853.43,2227.43) 2925.86,2227.43 ccw(c2998.28,2227.43) S6.1@2947.07,2176.21 ; S6.1@2904.64,2625.79 cw(c2853.43,2574.57) 2925.86,2574.57 cw(c2998.28,2574.57) S6.1@2947.07,2625.79 ; S6.1@2911.72,2169.14 ccw(c2877.57,2203.28) 2925.86,2203.28 ccw(c2974.14,2203.28) S6.1@2940,2169.14 ; S6.1@2911.72,2632.86 cw(c2877.57,2598.72) 2925.86,2598.72 cw(c2974.14,2598.72) S6.1@2940,2632.86 ; S6.1@2925.86,2155 S6.1@2925.86,2647 ; S5.1@3389,2183.28 ccw(c3320.72,2251.57) 3417.29,2251.57 ccw(c3513.85,2251.57) S5.1@3445.57,2183.28 ; S5.1@3389,2618.72 cw(c3320.72,2550.43) 3417.29,2550.43 cw(c3513.85,2550.43) S5.1@3445.57,2618.72 ; S5.1@3396.07,2176.21 ccw(c3344.86,2227.43) 3417.29,2227.43 ccw(c3489.71,2227.43) S5.1@3438.5,2176.21 ; S5.1@3396.07,2625.79 cw(c3344.86,2574.57) 3417.29,2574.57 cw(c3489.71,2574.57) S5.1@3438.5,2625.79 ; S5.1@3403.14,2169.14 ccw(c3369,2203.28) 3417.29,2203.28 ccw(c3465.57,2203.28) S5.1@3431.43,2169.14 ; S5.1@3403.14,2632.86 cw(c3369,2598.72) 3417.29,2598.72 cw(c3465.57,2598.72) S5.1@3431.43,2632.86 ; S5.1@3406.32,2685.47 ccw(c3402.18,2700) 3417.29,2700 ; S5.1@3417.29,2155 S5.1@3417.29,2647 3417.29,2700 ; S5.1@3428.25,2685.47 cw(c3432.4,2700) 3417.29,2700 ; v1@3688.64,3358.64 cw(c3673.27,3343.27) 3695,3343.27 cw(c3716.73,3343.27) v1@3701.36,3358.64 ; v1(3695,3365) 3695,2775 3665,2745 3462.29,2745 3417.29,2700 ; S4.1@3880.43,2183.28 ccw(c3812.15,2251.57) 3908.71,2251.57 ccw(c4005.28,2251.57) S4.1@3937,2183.28 ; S4.1@3880.43,2618.72 cw(c3812.15,2550.43) 3908.71,2550.43 cw(c4005.28,2550.43) S4.1@3937,2618.72 ; S4.1@3887.5,2176.21 ccw(c3836.29,2227.43) 3908.71,2227.43 ccw(c3981.14,2227.43) S4.1@3929.93,2176.21 ; S4.1@3887.5,2625.79 cw(c3836.29,2574.57) 3908.71,2574.57 cw(c3981.14,2574.57) S4.1@3929.93,2625.79 ; S4.1@3894.57,2169.14 ccw(c3860.43,2203.28) 3908.71,2203.28 ccw(c3957,2203.28) S4.1@3922.86,2169.14 ; S4.1@3894.57,2632.86 cw(c3860.43,2598.72) 3908.71,2598.72 cw(c3957,2598.72) S4.1@3922.86,2632.86 ; S4.1@3908.71,2155 S4.1@3908.71,2647 ; S3.1@4371.86,2183.28 ccw(c4303.57,2251.57) 4400.14,2251.57 ccw(c4496.71,2251.57) S3.1@4428.43,2183.28 ; S3.1@4371.86,2618.72 cw(c4303.57,2550.43) 4400.14,2550.43 cw(c4496.71,2550.43) S3.1@4428.43,2618.72 ; S3.1@4378.93,2176.21 ccw(c4327.72,2227.43) 4400.14,2227.43 ccw(c4472.57,2227.43) S3.1@4421.36,2176.21 ; S3.1@4378.93,2625.79 cw(c4327.72,2574.57) 4400.14,2574.57 cw(c4472.57,2574.57) S3.1@4421.36,2625.79 ; S3.1@4386,2169.14 ccw(c4351.86,2203.28) 4400.14,2203.28 ccw(c4448.43,2203.28) S3.1@4414.28,2169.14 ; S3.1@4386,2632.86 cw(c4351.86,2598.72) 4400.14,2598.72 cw(c4448.43,2598.72) S3.1@4414.28,2632.86 ; S3.1@4400.14,2155 S3.1@4400.14,2647 ; S2.1@4863.29,2183.28 ccw(c4795,2251.57) 4891.57,2251.57 ccw(c4988.14,2251.57) S2.1@4919.86,2183.28 ; S2.1@4863.29,2618.72 cw(c4795,2550.43) 4891.57,2550.43 cw(c4988.14,2550.43) S2.1@4919.86,2618.72 ; S2.1@4870.36,2176.21 ccw(c4819.15,2227.43) 4891.57,2227.43 ccw(c4964,2227.43) S2.1@4912.79,2176.21 ; S2.1@4870.36,2625.79 cw(c4819.15,2574.57) 4891.57,2574.57 cw(c4964,2574.57) S2.1@4912.79,2625.79 ; S2.1@4877.43,2169.14 ccw(c4843.29,2203.28) 4891.57,2203.28 ccw(c4939.86,2203.28) S2.1@4905.71,2169.14 ; S2.1@4877.43,2632.86 cw(c4843.29,2598.72) 4891.57,2598.72 cw(c4939.86,2598.72) S2.1@4905.71,2632.86 ; S2.1@4891.57,2155 S2.1@4891.57,2647 ; S1.1@5354.72,2183.28 ccw(c5286.43,2251.57) 5383,2251.57 ccw(c5479.57,2251.57) S1.1@5411.28,2183.28 ; S1.1@5354.72,2618.72 cw(c5286.43,2550.43) 5383,2550.43 cw(c5479.57,2550.43) S1.1@5411.28,2618.72 ; S1.1@5361.79,2176.21 ccw(c5310.57,2227.43) 5383,2227.43 ccw(c5455.43,2227.43) S1.1@5404.21,2176.21 ; S1.1@5361.79,2625.79 cw(c5310.57,2574.57) 5383,2574.57 cw(c5455.43,2574.57) S1.1@5404.21,2625.79 ; S1.1@5368.86,2169.14 ccw(c5334.72,2203.28) 5383,2203.28 ccw(c5431.28,2203.28) S1.1@5397.14,2169.14 ; S1.1@5368.86,2632.86 cw(c5334.72,2598.72) 5383,2598.72 cw(c5431.28,2598.72) S1.1@5397.14,2632.86 ; S1.1@5383,2155 S1.1@5383,2647
NetD20_2: D20.2 S1.2 | length 2036.5
  Top Layer w10: S1.2@5580,2647 5670,2737 D20.2@5670,2982.2 ; S1.2@5580,2667 ccw(c5580,2715.28) 5614.14,2681.14 ccw(c5648.28,2647) S1.2@5600,2647 ; S1.2@5580,2677 ccw(c5580,2749.43) 5631.21,2698.21 ccw(c5682.43,2647) S1.2@5610,2647 ; S1.2@5580,2687 ccw(c5580,2783.57) 5648.28,2715.28 ccw(c5716.57,2647) S1.2@5620,2647 ; D20.2@5652.66,2964.86 cw(c5610.79,2922.99) 5670,2922.99 cw(c5729.21,2922.99) D20.2@5687.34,2964.86 ; D20.2@5659.73,2971.93 cw(c5634.93,2947.13) 5670,2947.13 cw(c5705.07,2947.13) D20.2@5680.27,2971.93
  Bottom Layer w10: S1.2@5551.72,2183.28 ccw(c5483.43,2251.57) 5580,2251.57 ccw(c5676.57,2251.57) S1.2@5608.28,2183.28 ; S1.2@5551.72,2618.72 cw(c5483.43,2550.43) 5580,2550.43 cw(c5676.57,2550.43) S1.2@5608.28,2618.72 ; S1.2@5558.79,2176.21 ccw(c5507.57,2227.43) 5580,2227.43 ccw(c5652.43,2227.43) S1.2@5601.21,2176.21 ; S1.2@5558.79,2625.79 cw(c5507.57,2574.57) 5580,2574.57 cw(c5652.43,2574.57) S1.2@5601.21,2625.79 ; S1.2@5565.86,2169.14 ccw(c5531.72,2203.28) 5580,2203.28 ccw(c5628.28,2203.28) S1.2@5594.14,2169.14 ; S1.2@5565.86,2632.86 cw(c5531.72,2598.72) 5580,2598.72 cw(c5628.28,2598.72) S1.2@5594.14,2632.86 ; S1.2@5580,2155 S1.2@5580,2647
NetD21_2: D21.2 S2.2 | length 2333
  Top Layer w10: S2.2@5088.57,2647 5177.43,2735.86 5455.86,2735.86 5500.71,2780.71 D21.2@5500.71,2982.2 ; S2.2@5088.57,2667 ccw(c5088.57,2715.28) 5122.71,2681.14 ccw(c5156.86,2647) S2.2@5108.57,2647 ; S2.2@5088.57,2677 ccw(c5088.57,2749.43) 5139.79,2698.21 ccw(c5191,2647) S2.2@5118.57,2647 ; S2.2@5088.57,2687 ccw(c5088.57,2783.57) 5156.86,2715.28 ccw(c5225.14,2647) S2.2@5128.57,2647 ; D21.2@5483.37,2964.86 cw(c5441.5,2922.99) 5500.71,2922.99 cw(c5559.93,2922.99) D21.2@5518.06,2964.86 ; D21.2@5490.44,2971.93 cw(c5465.64,2947.13) 5500.71,2947.13 cw(c5535.79,2947.13) D21.2@5510.99,2971.93
  Bottom Layer w10: S2.2@5060.29,2183.28 ccw(c4992,2251.57) 5088.57,2251.57 ccw(c5185.14,2251.57) S2.2@5116.86,2183.28 ; S2.2@5060.29,2618.72 cw(c4992,2550.43) 5088.57,2550.43 cw(c5185.14,2550.43) S2.2@5116.86,2618.72 ; S2.2@5067.36,2176.21 ccw(c5016.15,2227.43) 5088.57,2227.43 ccw(c5161,2227.43) S2.2@5109.79,2176.21 ; S2.2@5067.36,2625.79 cw(c5016.15,2574.57) 5088.57,2574.57 cw(c5161,2574.57) S2.2@5109.79,2625.79 ; S2.2@5074.43,2169.14 ccw(c5040.29,2203.28) 5088.57,2203.28 ccw(c5136.86,2203.28) S2.2@5102.71,2169.14 ; S2.2@5074.43,2632.86 cw(c5040.29,2598.72) 5088.57,2598.72 cw(c5136.86,2598.72) S2.2@5102.71,2632.86 ; S2.2@5088.57,2155 S2.2@5088.57,2647
NetD22_2: D22.2 S3.2 | length 2646.8
  Top Layer w10: S3.2@4597.14,2647 4706,2755.86 5292.29,2755.86 5331.43,2795 D22.2@5331.43,2982.2 ; S3.2@4597.14,2667 ccw(c4597.14,2715.28) 4631.28,2681.14 ccw(c4665.43,2647) S3.2@4617.14,2647 ; S3.2@4597.14,2677 ccw(c4597.14,2749.43) 4648.36,2698.21 ccw(c4699.57,2647) S3.2@4627.14,2647 ; S3.2@4597.14,2687 ccw(c4597.14,2783.57) 4665.43,2715.28 ccw(c4733.71,2647) S3.2@4637.14,2647 ; D22.2@5314.08,2964.86 cw(c5272.21,2922.99) 5331.43,2922.99 cw(c5390.64,2922.99) D22.2@5348.77,2964.86 ; D22.2@5321.16,2971.93 cw(c5296.36,2947.13) 5331.43,2947.13 cw(c5366.5,2947.13) D22.2@5341.7,2971.93
  Bottom Layer w10: S3.2@4568.86,2183.28 ccw(c4500.57,2251.57) 4597.14,2251.57 ccw(c4693.71,2251.57) S3.2@4625.43,2183.28 ; S3.2@4568.86,2618.72 cw(c4500.57,2550.43) 4597.14,2550.43 cw(c4693.71,2550.43) S3.2@4625.43,2618.72 ; S3.2@4575.93,2176.21 ccw(c4524.72,2227.43) 4597.14,2227.43 ccw(c4669.57,2227.43) S3.2@4618.36,2176.21 ; S3.2@4575.93,2625.79 cw(c4524.72,2574.57) 4597.14,2574.57 cw(c4669.57,2574.57) S3.2@4618.36,2625.79 ; S3.2@4583,2169.14 ccw(c4548.86,2203.28) 4597.14,2203.28 ccw(c4645.43,2203.28) S3.2@4611.28,2169.14 ; S3.2@4583,2632.86 cw(c4548.86,2598.72) 4597.14,2598.72 cw(c4645.43,2598.72) S3.2@4611.28,2632.86 ; S3.2@4597.14,2155 S3.2@4597.14,2647